# EAGLE board STorM32 NT motor module v008-panelized (EAGLE 6.5.0)
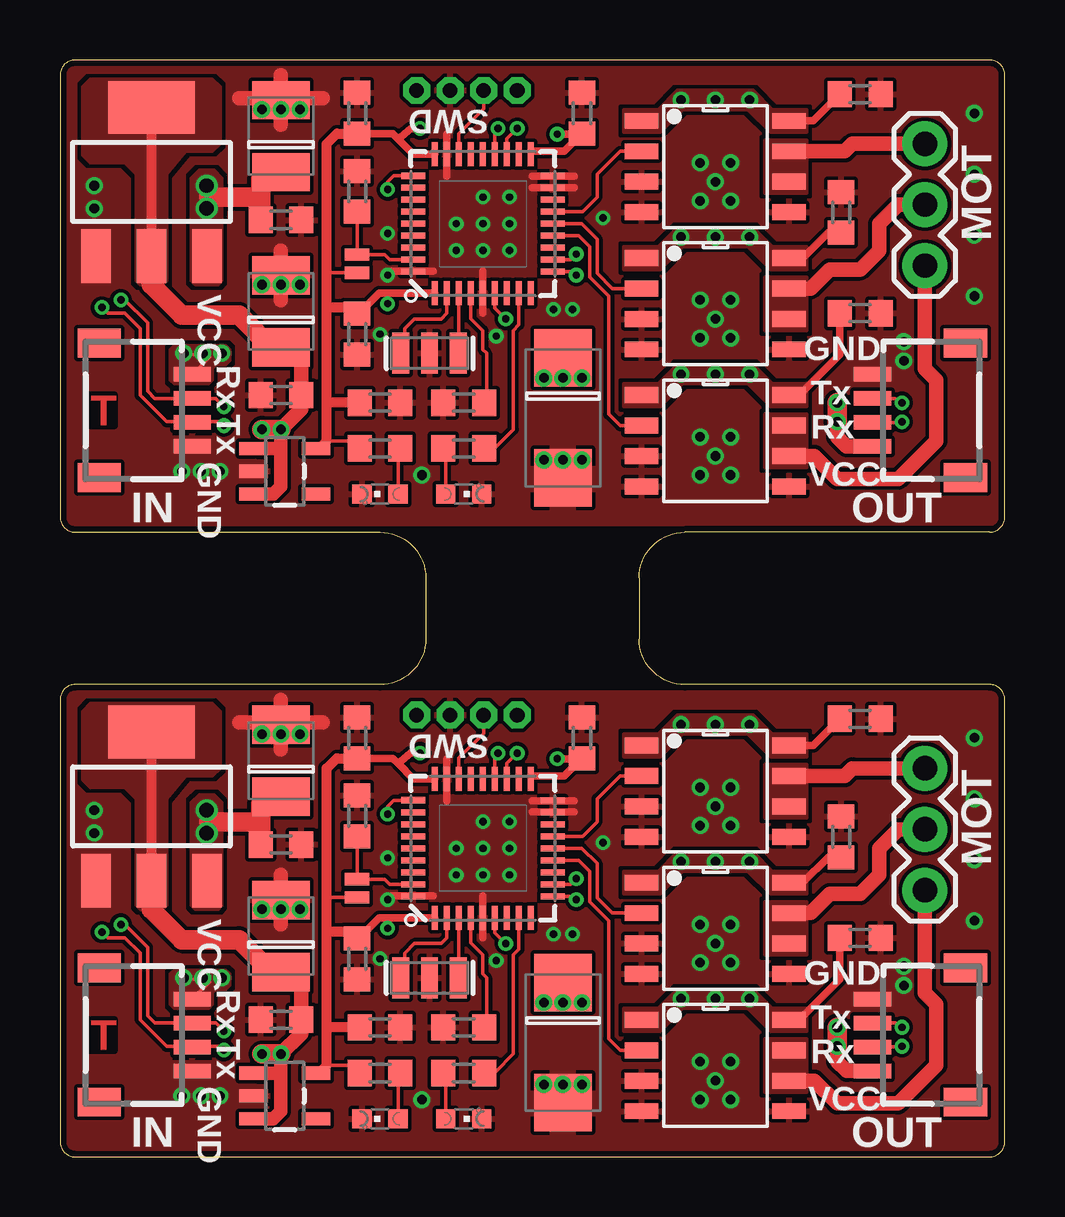
[diagram p0: board, top side]
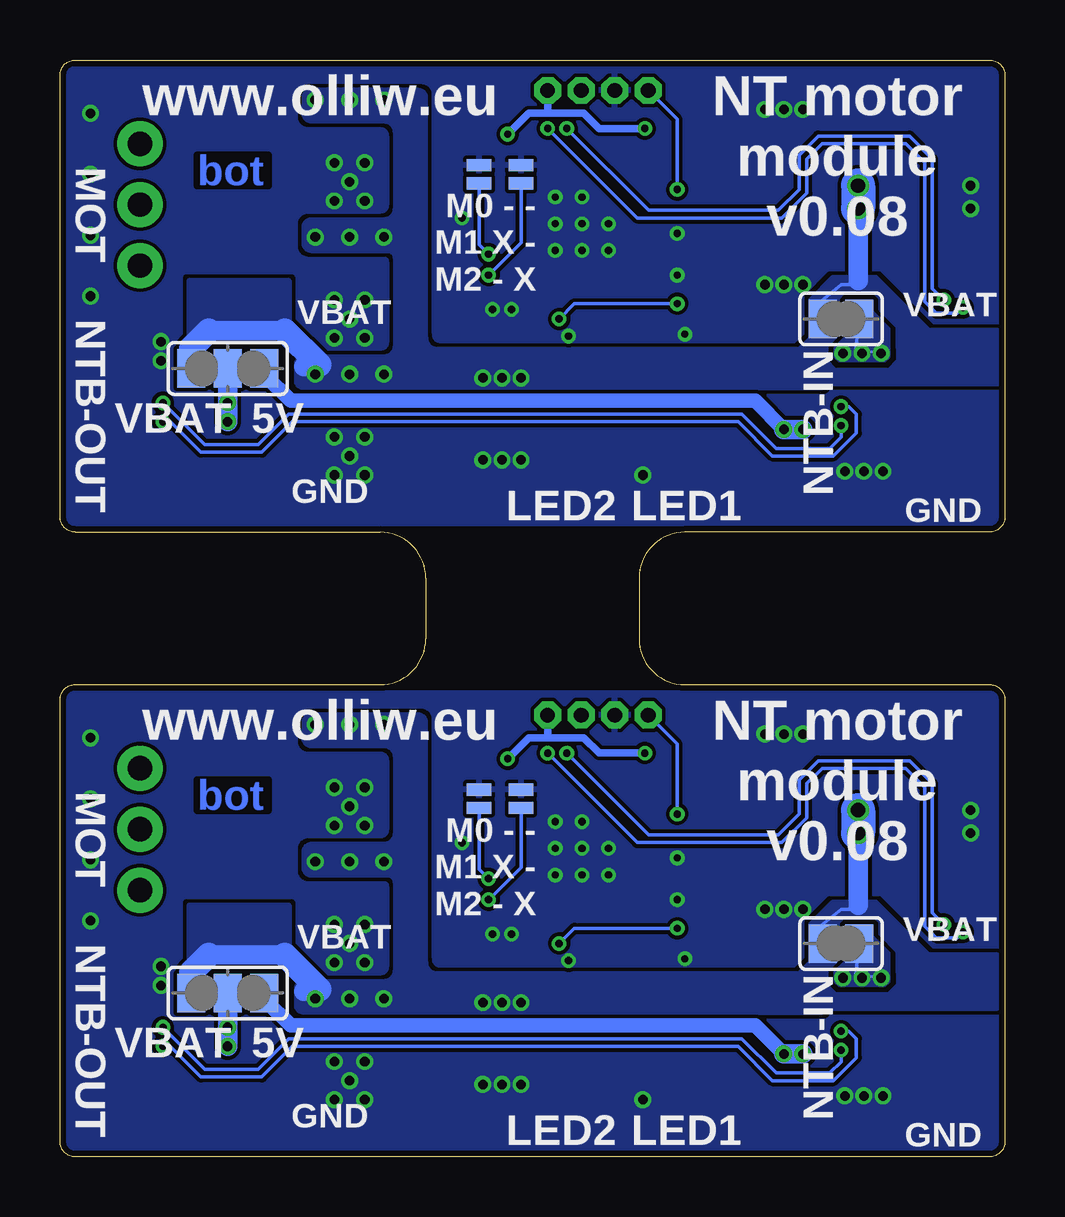
[diagram p1: board, bottom side, seen from below]

Size 39.37 x 45.72 mm. Coordinates in mm from the lower left corner, seen from the top.
Outline: 0.64,0 38.73,0 arc90 39.37,0.64 39.37,19.05 arc90 38.73,19.68 26.04,19.68 arc-90 24.13,21.59 24.13,24.13 arc-90 26.04,26.04 38.73,26.04 arc90 39.37,26.67 39.37,45.08 arc90 38.73,45.72 0.64,45.72 arc90 0,45.08 0,26.67 arc90 0.64,26.04 13.34,26.04 arc-90 15.24,24.13 15.24,21.59 arc-90 13.34,19.68 0.64,19.68 arc90 0,19.05 0,0.64 arc90 0.64,0
Copper layers (1*16): Top 0.035mm / dielectric 1.5mm / Bottom 0.035mm
Design rules "Fusion_eagle_rule_v1.1-shapes-supply-changed": minimum track width 6mil, minimum drill 12mil, track to track 6mil, track to pad 6mil, pad to pad 6mil, via to via 6mil, smd to smd 0mil, copper to edge 10mil, drill to drill 10mil, minimum pad ring 10mil, minimum via ring 6mil, stop-mask expansion 2mil, vias tented up to drill 100mil, thermal gap 6mil

## Footprints (pad centres in the part's own frame; a part is rotated, then mirrored left to right if it is on the bottom)
SMC_C = smd 2.4 x 2.4: + -2.5,0; - 2.5,0
C0603 = smd 1 x 1.1: 1 -0.85,0; 2 0.85,0
SMC_B = smd 1.6 x 2.4: + -1.5,0; - 1.5,0
SOT223 = smd 1.219 x 2.235: 1 -2.311,-3.099; 2 0,-3.099; 3 2.311,-3.099 | smd 3.6 x 2.2: 4 0,3.099
SOT23-5 = smd 0.55 x 1.2: 1 -0.95,-1.3; 2 0,-1.3; 3 0.95,-1.3; 4 0.95,1.3; 5 -0.95,1.3
4X1_1P27_OCT_BILEX = drill 0.61 pad 1.118 octagon: 1 0,0; 2 0,-1.397; 3 0,-2.794; 4 0,-4.191
CHIPLED_0603 = smd 0.8 x 0.8: A 0,-0.75; C 0,0.75
1X03 = drill 1.016 pad 1.88: 1 0,0; 2 2.54,0; 3 5.08,0
SM04B-SRSS-TB = smd 0.6 x 1.55: 1 -1.5,2.975; 2 -0.5,2.975; 3 0.5,2.975; 4 1.5,2.975 | smd 1.2 x 1.8: FIT@1 -2.8,-0.9; FIT@2 2.8,-0.9
R0603 = smd 1 x 1.1: 1 -0.85,0; 2 0.85,0
SJ_2 = smd 1.168 x 1.6: 1 -1.524,0; 2 0,0; 3 1.524,0
SJ_2S-NO = smd 0.508 x 1.016: 1 -0.381,0; 2 0.381,0
SJ_1T = smd 1.168 x 1.6: 1 -0.762,0; 3 0.762,0
VFQFPN36 = smd 1 x 0.25: 1 -2.9,2; 2 -2.9,1.5; 3 -2.9,1; 4 -2.9,0.5; 5 -2.9,0; 6 -2.9,-0.5; 7 -2.9,-1; 8 -2.9,-1.5; 9 -2.9,-2; 19 2.9,-2; 20 2.9,-1.5; 21 2.9,-1; 22 2.9,-0.5; 23 2.9,0; 24 2.9,0.5; 25 2.9,1; 26 2.9,1.5; 27 2.9,2 | smd 0.25 x 1: 10 -2,-2.9; 11 -1.5,-2.9; 12 -1,-2.9; 13 -0.5,-2.9; 14 0,-2.9; 15 0.5,-2.9; 16 1,-2.9; 17 1.5,-2.9; 18 2,-2.9; 29 1.5,2.9; 30 1,2.9; 31 0.5,2.9; 32 0,2.9; 33 -0.5,2.9; 34 -1,2.9; 35 -1.5,2.9; 36 -2,2.9 | smd 0.27 x 1: 28 2,2.9
DFN8 = smd 0.66 x 1.397: 1 0,-3.073; 2 1.27,-3.073; 3 2.54,-3.073; 4 3.81,-3.073; 5 3.81,3.073; 6 2.54,3.073; 7 1.27,3.073; 8 0,3.073
RESONATOR-SMD = smd 0.7 x 1.7: 1 -1.2,0; 2 0,0; 3 1.2,0

## Placement (x,y rotation side)
C1  33u/20V  [SMC_C]  20.96,4.76 270 top
C2  100n  [C0603]  33.34,18.26 0 top
C3  100n  [C0603]  32.54,13.34 90 top
C4  100n  [C0603]  33.34,9.13 0 top
C5  10u/6.3V  [SMC_B]  9.21,9.21 90 top
C6  100n  [C0603]  9.21,5.71 180 top
C7  1u  [C0603]  13.34,5.4 0 top
C8  100n  [C0603]  16.83,5.4 180 top
C9  100n  [C0603]  12.38,8.26 270 top
C10  100n  [C0603]  21.75,17.46 90 top
C11  100n  [C0603]  12.38,17.46 90 top
C12  10u/20V  [SMC_B]  9.21,16.51 90 top
C13  33u/20V  [SMC_C]  20.96,30.8 270 top
C14  100n  [C0603]  9.21,13.02 0 top
C15  100n  [C0603]  33.34,44.29 0 top
C16  100n  [C0603]  32.54,39.37 90 top
C17  100n  [C0603]  33.34,35.16 0 top
C18  100n  [C0603]  16.83,31.43 180 top
C19  100n  [C0603]  12.38,34.29 270 top
C20  100n  [C0603]  21.75,43.5 90 top
C21  100n  [C0603]  12.38,43.5 90 top
C22  10u/6.3V  [SMC_B]  9.21,35.24 90 top
C23  100n  [C0603]  9.21,31.75 180 top
C24  1u  [C0603]  13.34,31.43 0 top
C25  10u/20V  [SMC_B]  9.21,42.54 90 top
C26  100n  [C0603]  9.21,39.05 0 top
IC1  NCP1117ST50T3G  [SOT223]  3.81,14.61 0 top
IC2  [SOT23-5]  9.37,2.54 270 top
IC3  [SOT23-5]  9.37,28.57 270 top
IC4  NCP1117ST50T3G  [SOT223]  3.81,40.64 0 top
JP1  SWD  [4X1_1P27_OCT_BILEX]  19.05,44.45 270 top
JP2  SWD  [4X1_1P27_OCT_BILEX]  19.05,18.41 270 top
LED1  red  [CHIPLED_0603]  13.34,1.59 90 top
LED2  green  [CHIPLED_0603]  16.83,1.59 270 top
LED3  red  [CHIPLED_0603]  13.34,27.62 90 top
LED4  green  [CHIPLED_0603]  16.83,27.62 270 top
MOT  [1X03]  36.04,11.11 90 top
MOT1  [1X03]  36.04,37.15 90 top
NTB-IN  NTB1  [SM04B-SRSS-TB]  2.54,5.08 270 top
NTB-IN1  NTB1  [SM04B-SRSS-TB]  2.54,31.11 270 top
NTB-OUT  NTB2  [SM04B-SRSS-TB]  36.83,5.08 90 top
NTB-OUT1  NTB2  [SM04B-SRSS-TB]  36.83,31.11 90 top
R1  4.7k  [R0603]  13.34,3.49 0 top
R2  10k  [R0603]  12.38,40.24 270 top
R3  4.7k  [R0603]  13.34,29.53 0 top
R4  2.2k  [R0603]  16.83,29.53 180 top
R6  2.2k  [R0603]  16.83,3.49 180 top
R7  10k  [R0603]  12.38,14.21 270 top
SJ1  [SJ_2]  32.38,6.83 180 bottom
SJ2  BOOT0  [SJ_2S-NO]  12.38,11.19 90 top
SJ3  ID1  [SJ_2S-NO]  20.16,14.92 90 bottom
SJ4  ID2  [SJ_2S-NO]  21.91,14.92 90 bottom
SJ5  [SJ_1T]  6.83,8.89 0 bottom
SJ6  BOOT0  [SJ_2S-NO]  12.38,37.23 90 top
SJ7  [SJ_2]  32.38,32.86 180 bottom
SJ8  ID1  [SJ_2S-NO]  20.16,40.96 90 bottom
SJ9  ID2  [SJ_2S-NO]  21.91,40.96 90 bottom
SJ10  [SJ_1T]  6.83,34.92 0 bottom
U1  STM32F10XTXU6  [VFQFPN36]  17.62,12.86 90 top
U2  STM32F10XTXU6  [VFQFPN36]  17.62,38.89 90 top
U$1  TC4452DFN08  [DFN8]  27.3,5.71 270 top
U$2  TC4452DFN08  [DFN8]  27.3,11.43 270 top
U$3  TC4452DFN08  [DFN8]  27.3,31.75 270 top
U$4  TC4452DFN08  [DFN8]  27.3,17.14 270 top
U$5  TC4452DFN08  [DFN8]  27.3,37.46 270 top
U$6  TC4452DFN08  [DFN8]  27.3,43.18 270 top
Y1  RESONATORSMD  [RESONATOR-SMD]  15.4,7.46 0 top
Y2  RESONATORSMD  [RESONATOR-SMD]  15.4,33.5 0 top

## Library data of the parts
C1-C26 R1-R4 R6 R7 = rcl
IC1-IC4 SJ1-SJ10 Y1 Y2 = # SparkFun2
JP1 JP2 U$1-U$6 = # stdlib
LED1-LED4 = led
MOT MOT1 = # SparkFun
NTB-IN NTB-IN1 NTB-OUT NTB-OUT1 = con-jst2
U1 U2 = # stm32

## Nets
3.3V: C7.1 C9.1 C10.1 C11.1 IC2.5 JP2.1 R1.1 SJ2.1 U1.1 U1.6 U1.19 U1.27
3.3V1: C19.1 C20.1 C21.1 C24.1 IC3.5 JP1.1 R3.1 SJ6.1 U2.1 U2.6 U2.19 U2.27
5V: C5.+ C6.1 IC1.2 IC1.4 IC2.1 IC2.3 SJ1.1
5V1: C22.+ C23.1 IC3.1 IC3.3 IC4.2 IC4.4 SJ7.1
GND: C1.- C2.2 C3.2 C4.2 C5.- C6.2 C7.2 C8.2 C9.2 C10.2 C11.2 C12.- C14.2 IC1.1 IC2.2 JP2.3 LED1.C LED2.C NTB-IN.4 NTB-OUT.4 R7.1 SJ3.2 SJ4.2 U1.5 U1.17 U1.18 U1.26 U1.36 U$1.3 U$1.4 U$1.5 U$2.3 U$2.4 U$2.5 U$4.3 U$4.4 U$4.5 Y1.2
GND1: C13.- C15.2 C16.2 C17.2 C18.2 C19.2 C20.2 C21.2 C22.- C23.2 C24.2 C25.- C26.2 IC3.2 IC4.1 JP1.3 LED3.C LED4.C NTB-IN1.4 NTB-OUT1.4 R2.1 SJ8.2 SJ9.2 U2.5 U2.17 U2.18 U2.26 U2.36 U$3.3 U$3.4 U$3.5 U$5.3 U$5.4 U$5.5 U$6.3 U$6.4 U$6.5 Y2.2
LED: R6.1 U1.8
LED1: R4.1 U2.8
N$1: MOT.2 U$2.6 U$2.7
N$2: NTB-OUT.1 SJ1.2
N$3: SJ3.1 U1.10
N$4: SJ4.1 U1.11
N$5: MOT.1 U$1.6 U$1.7
N$6: MOT.3 U$4.6 U$4.7
N$7: C8.1 U1.4
N$8: R7.2 SJ2.2 U1.35
N$9: U1.2 Y1.1
N$10: U1.3 Y1.3
N$11: LED1.A R1.2
N$12: LED2.A R6.2
N$13: NTB-IN.1 SJ5.3
N$14: MOT1.2 U$5.6 U$5.7
N$15: MOT1.1 U$3.6 U$3.7
N$16: MOT1.3 U$6.6 U$6.7
N$17: C18.1 U2.4
N$18: R2.2 SJ6.2 U2.35
N$19: U2.2 Y2.1
N$20: U2.3 Y2.3
N$21: LED3.A R3.2
N$22: LED4.A R4.2
N$23: NTB-OUT1.1 SJ7.2
N$24: SJ8.1 U2.10
N$25: SJ9.1 U2.11
N$26: NTB-IN1.1 SJ10.3
PHASE1: U1.13 U$1.2
PHASE2: U1.14 U$2.2
PHASE3: U1.15 U$4.2
PHASE4: U2.13 U$3.2
PHASE5: U2.15 U$6.2
PHASE6: U2.14 U$5.2
RX: NTB-IN.2 NTB-OUT.2 U1.22
RX1: NTB-IN1.2 NTB-OUT1.2 U2.22
SWCLK: JP2.4 U1.28
SWCLK1: JP1.4 U2.28
SWDIO: JP2.2 U1.25
SWDIO1: JP1.2 U2.25
TX: NTB-IN.3 NTB-OUT.3 U1.21
TX1: NTB-IN1.3 NTB-OUT1.3 U2.21
VBAT: C1.+ C2.1 C3.1 C4.1 C12.+ C14.1 IC1.3 SJ1.3 SJ5.1 U$1.1 U$1.8 U$2.1 U$2.8 U$4.1 U$4.8
VBAT1: C13.+ C15.1 C16.1 C17.1 C25.+ C26.1 IC4.3 SJ7.3 SJ10.1 U$3.1 U$3.8 U$5.1 U$5.8 U$6.1 U$6.8

## Tracks (layer width: path | path; a pad name or v marks a point on that pad's centre or on a via)
3.3V  (via drill 0.3)
  Top 0.152: 12.17,9.37 C9.1 | U1.19 19.66,15.88 | U1.6 18.12,9.34 v18.57,8.89 | v13.65,9.53 13.65,9.96 | SJ2.1 11.21,10.81 11.11,10.95 | 21.61,16.59 C10.1 | 11.11,3.81 12.17,3.81 R1.1
  Top 0.305: U1.1 13.65,9.96 13.29,9.96 12.76,9.42 C9.1 | 19.66,15.88 21.01,15.88 C10.1 | U1.27 14.72,15.76 14.09,16.39 | 14.09,16.39 13.87,16.61 C11.1 | v15,16.83 14.61,16.83 14.09,16.39 | v20.72,16.59 21.61,16.59
  Top 0.406: 11.11,5.4 11.11,4.92 11.11,3.81 10.79,3.49 IC2.5 | 11.11,5.4 11.11,8.89 11.11,9.37 | 11.11,9.37 11.11,10.95 11.11,16.19 11.53,16.61 C11.1 | 12.17,9.37 11.11,9.37 | C7.1 11.11,5.4
  Bottom 0.152: v18.57,8.89 17.94,9.53 v13.65,9.53
  Bottom 0.305: v15,16.83 16.91,16.83 17.54,17.46 19.05,17.46 | 19.05,17.46 19.84,17.46 v20.72,16.59 | JP2.1 19.05,17.46
3.3V1  (via drill 0.3)
  Top 0.152: 12.17,35.4 C19.1 | U2.19 19.66,41.91 | U2.6 18.12,35.38 v18.57,34.92 | v13.65,35.56 13.65,35.99 | SJ6.1 11.21,36.85 11.11,36.99 | 21.61,42.62 C20.1 | 11.11,29.84 12.17,29.84 R3.1
  Top 0.305: U2.1 13.65,35.99 13.29,35.99 12.76,35.46 C19.1 | 19.66,41.91 21.01,41.91 C20.1 | U2.27 14.72,41.79 14.09,42.43 | 14.09,42.43 13.87,42.65 C21.1 | v15,42.86 14.61,42.86 14.09,42.43 | v20.72,42.62 21.61,42.62
  Top 0.406: 11.11,31.43 11.11,30.95 11.11,29.84 10.79,29.53 IC3.5 | 11.11,31.43 11.11,34.92 11.11,35.4 | 11.11,35.4 11.11,36.99 11.11,42.23 11.53,42.65 C21.1 | 12.17,35.4 11.11,35.4 | C24.1 11.11,31.43
  Bottom 0.152: v18.57,34.92 17.94,35.56 v13.65,35.56
  Bottom 0.305: v15,42.86 16.91,42.86 17.54,43.5 19.05,43.5 | 19.05,43.5 19.84,43.5 v20.72,42.62 | JP1.1 19.05,43.5
5V  (via drill 0.4)
  Top 0.152: 10.06,7.56 9.84,7.78 9.28,7.78 C5.+ | 8.89,3.49 9.21,3.65
  Top 0.406: IC1.4 IC1.2
  Top 0.559: IC2.3 8.89,1.59 9.21,1.9 9.21,3.65 v9.21,4.29 | IC2.1 8.89,3.49
  Top 0.61: 10.06,7.56 C6.1 10.06,5.14 v9.21,4.29
  Top 0.813: IC1.2 3.81,10.32 5.08,9.05 7.46,9.05 8.89,7.62 C5.+ | v8.41,4.29 v9.21,4.29
  Bottom 0.61: SJ1.1 30.86,6.57 29.77,5.48 10.4,5.48 v9.21,4.29
  Bottom 0.813: v8.41,4.29 v9.21,4.29
  pour Top (no thermals): 0.95,18.57 1.27,18.89 6.35,18.89 6.67,18.57 6.67,16.19 6.35,15.88 5.24,15.88 4.45,14.92 4.45,10.48 4.29,10.32 3.33,10.32 3.18,10.48 3.18,14.92 2.7,15.4 1.27,15.4 0.95,15.72
5V1  (via drill 0.4)
  Top 0.152: 10.06,33.6 9.84,33.81 9.28,33.81 C22.+ | 8.89,29.53 9.21,29.69
  Top 0.406: IC4.4 IC4.2
  Top 0.559: IC3.3 8.89,27.62 9.21,27.94 9.21,29.69 v9.21,30.32 | IC3.1 8.89,29.53
  Top 0.61: 10.06,33.6 C23.1 10.06,31.17 v9.21,30.32
  Top 0.813: IC4.2 3.81,36.35 5.08,35.08 7.46,35.08 8.89,33.65 C22.+ | v8.41,30.32 v9.21,30.32
  Bottom 0.61: SJ7.1 30.86,32.61 29.77,31.51 10.4,31.51 v9.21,30.32
  Bottom 0.813: v8.41,30.32 v9.21,30.32
  pour Top (no thermals): 0.95,44.61 1.27,44.93 6.35,44.93 6.67,44.61 6.67,42.23 6.35,41.91 5.24,41.91 4.45,40.96 4.45,36.51 4.29,36.35 3.33,36.35 3.18,36.51 3.18,40.96 2.7,41.43 1.27,41.43 0.95,41.75
GND  (via drill 0.3, 0.4)
  Top 0.305: 19.68,14.37 21.43,14.37 | 19.68,14.84 21.43,14.84 | 15.56,10.87 13.81,10.87 | 17.62,9.13 17.62,10.87 | 16.11,14.84 16.11,16.59
  Top 0.61: 7.46,18.1 10.95,18.1 | 9.21,9.68 9.21,11.75 | 9.21,16.99 9.21,19.05
  other vias: 27.94,2.38 26.67,3.97 27.94,3.97 26.67,2.38 27.3,3.18 27.94,8.1 26.67,9.68 27.94,9.68 26.67,8.1 27.3,8.89 27.94,13.81 26.67,15.4 27.94,15.4 26.67,13.81 27.3,14.61 18.18,8.18 13.65,12.46 13.65,10.72 21.75,3.02 20.96,3.02 20.16,3.02 1.43,13.49 1.43,14.45 8.41,17.62 9.21,17.62 10,17.62 10,10.32 9.21,10.32 8.41,10.32 5.08,2.54 5.87,2.54 35.16,7.94 22.62,13.1 21.35,9.29 20.56,9.29 17.62,12.86 16.51,11.75 18.73,11.75 18.73,13.97 18.73,12.86 17.62,11.75 16.51,12.86 17.62,13.97 13.34,8.26 15.08,2.38 38.1,12.38 38.1,14.92 38.1,17.46 38.1,9.84 35.16,7.14 6.67,2.54
  pour Top (isolate 0.152, rank 6): 39.37,19.37 0,19.37 0,0 39.37,0
  pour Bottom (isolate 0.152, rank 6): 39.37,0 0,0 0,19.37 39.37,19.37
  pour Top (no thermals): 19.37,2.7 22.54,2.7 22.54,1.75 19.37,1.75
  pour Top (no thermals): 20.48,0.64 20.48,3.65 21.43,3.65 21.43,0.64
  pour Top (no thermals): 4.29,3.97 6.67,3.97 6.67,2.86 4.29,2.86
  pour Top (no thermals): 0.64,13.18 0.64,10.16 2.38,10.16 2.38,13.18
  pour Top (no thermals): 32.7,7.14 32.7,6.03 34.92,6.03 34.92,7.14
  pour Top (no thermals): 6.67,3.02 8.41,3.02 8.57,2.86 8.57,2.22 8.41,2.06 6.67,2.06
GND1  (via drill 0.3, 0.4)
  Top 0.305: 19.68,40.4 21.43,40.4 | 19.68,40.88 21.43,40.88 | 15.56,36.91 13.81,36.91 | 17.62,35.16 17.62,36.91 | 16.11,40.88 16.11,42.62
  Top 0.61: 7.46,44.13 10.95,44.13 | 9.21,35.72 9.21,37.78 | 9.21,43.02 9.21,45.08
  other vias: 27.94,28.42 26.67,30 27.94,30 26.67,28.42 27.3,29.21 27.94,34.13 26.67,35.72 27.94,35.72 26.67,34.13 27.3,34.92 27.94,39.85 26.67,41.43 27.94,41.43 26.67,39.85 27.3,40.64 18.18,34.21 13.65,38.5 13.65,36.75 21.75,29.05 20.96,29.05 20.16,29.05 1.43,39.53 1.43,40.48 8.41,43.66 9.21,43.66 10,43.66 10,36.35 9.21,36.35 8.41,36.35 5.08,28.57 5.87,28.57 35.16,33.97 22.62,39.13 21.35,35.32 20.56,35.32 17.62,38.89 16.51,37.78 18.73,37.78 18.73,40 18.73,38.89 17.62,37.78 16.51,38.89 17.62,40 13.34,34.29 15.08,28.42 38.1,38.42 38.1,40.96 38.1,43.5 38.1,35.88 35.16,33.18 6.67,28.57
  pour Top (isolate 0.152, rank 6): 39.37,45.72 0,45.72 0,26.35 39.37,26.35
  pour Bottom (isolate 0.152, rank 6): 39.37,26.35 0,26.35 0,45.72 39.37,45.72
  pour Top (no thermals): 19.37,28.73 22.54,28.73 22.54,27.78 19.37,27.78
  pour Top (no thermals): 20.48,26.67 20.48,29.69 21.43,29.69 21.43,26.67
  pour Top (no thermals): 4.29,30 6.67,30 6.67,28.89 4.29,28.89
  pour Top (no thermals): 0.64,39.21 0.64,36.2 2.38,36.2 2.38,39.21
  pour Top (no thermals): 32.7,33.18 32.7,32.07 34.92,32.07 34.92,33.18
  pour Top (no thermals): 6.67,29.05 8.41,29.05 8.57,28.89 8.57,28.26 8.41,28.1 6.67,28.1
LED
  Top 0.152: R6.1 18.15,3.55 18.89,4.29 18.89,8.41 19.12,8.64 U1.8
LED1
  Top 0.152: R4.1 18.15,29.58 18.89,30.32 18.89,34.45 19.12,34.68 U2.8
N$1
  Top 0.61: U$2.7 31.27,10.16 32.07,10.95 33.34,10.95 34.13,11.75 34.13,12.86 34.92,13.65 MOT.2
  pour Top (no thermals): 29.37,10.64 31.11,10.64 31.11,8.41 29.37,8.41
N$2  (via drill 0.4)
  Top 0.61: NTB-OUT.1 32.79,3.58 32.38,3.97 v32.38,4.6
  Top 0.813: v32.38,4.6 v32.38,5.4
  Bottom 0.813: SJ1.2 v32.38,5.4 v32.38,4.6
N$3  (via drill 0.3)
  Top 0.152: U1.10 21.37,10.86 v21.51,10.72
  Bottom 0.152: v21.51,10.72 20.16,12.07 SJ3.1
N$4  (via drill 0.3)
  Top 0.152: U1.11 21.28,11.36 v21.51,11.59
  Bottom 0.152: v21.51,11.59 21.91,11.99 SJ4.1
N$5
  Top 0.61: MOT.1 36.04,6.83 36.51,6.35 36.51,3.81 34.92,2.22 32.38,2.22 31.43,3.18 U$1.6
  pour Top (no thermals): 29.37,4.92 31.11,4.92 31.11,2.7 29.37,2.7
N$6
  Top 0.61: U$4.7 32.7,15.88 33.02,16.19 MOT.3
  pour Top (no thermals): 29.37,16.35 31.11,16.35 31.11,14.13 29.37,14.13
N$7
  Top 0.152: U1.4 17.12,8.91 17.62,8.41 17.62,7.62 17.78,7.46 17.78,5.45 C8.1
N$8
  Top 0.152: U1.35 13.74,11.36 13.53,11.57 SJ2.2 R7.2
N$9
  Top 0.152: U1.2 16.12,9.14 15.88,8.89 14.76,8.89 14.36,8.48 14.36,7.78 Y1.1
N$10
  Top 0.152: U1.3 16.62,7.76 Y1.3
N$11
  Top 0.152: LED1.A 14.09,3.39 R1.2
N$12
  Top 0.152: LED2.A 16.08,3.39 R6.2
N$13  (via drill 0.4)
  Top 0.152: v5.16,7.46 6.24,7.3 NTB-IN.1
  Bottom 0.152: SJ5.3 6.22,7.59 v5.16,7.46
  other vias: 5.95,7.46 6.75,7.46
  pour Top (no thermals): 4.76,7.78 6.91,7.78 7.06,7.62 7.06,7.14 6.91,6.99 6.51,6.99 6.35,6.83 6.35,6.35 6.19,6.19 4.76,6.19 4.6,6.35 4.6,7.62
  pour Bottom (no thermals): 4.84,8.49 4.84,7.3 5,7.14 6.91,7.14 7.06,7.3 7.06,7.7 5.56,9.21
N$14
  Top 0.61: U$5.7 31.27,36.2 32.07,36.99 33.34,36.99 34.13,37.78 34.13,38.89 34.92,39.69 MOT1.2
  pour Top (no thermals): 29.37,36.67 31.11,36.67 31.11,34.45 29.37,34.45
N$15
  Top 0.61: MOT1.1 36.04,32.86 36.51,32.38 36.51,29.84 34.92,28.26 32.38,28.26 31.43,29.21 U$3.6
  pour Top (no thermals): 29.37,30.96 31.11,30.96 31.11,28.73 29.37,28.73
N$16
  Top 0.61: U$6.7 32.7,41.91 33.02,42.23 MOT1.3
  pour Top (no thermals): 29.37,42.39 31.11,42.39 31.11,40.16 29.37,40.16
N$17
  Top 0.152: U2.4 17.12,34.95 17.62,34.45 17.62,33.65 17.78,33.5 17.78,31.49 C18.1
N$18
  Top 0.152: U2.35 13.74,37.39 13.53,37.61 SJ6.2 R2.2
N$19
  Top 0.152: U2.2 16.12,35.17 15.88,34.92 14.76,34.92 14.36,34.52 14.36,33.81 Y2.1
N$20
  Top 0.152: U2.3 16.62,33.79 Y2.3
N$21
  Top 0.152: LED3.A 14.09,29.43 R3.2
N$22
  Top 0.152: LED4.A 16.08,29.43 R4.2
N$23  (via drill 0.4)
  Top 0.61: NTB-OUT1.1 32.79,29.62 32.38,30 v32.38,30.64
  Top 0.813: v32.38,30.64 v32.38,31.43
  Bottom 0.813: SJ7.2 v32.38,31.43 v32.38,30.64
N$24  (via drill 0.3)
  Top 0.152: U2.10 21.37,36.89 v21.51,36.75
  Bottom 0.152: v21.51,36.75 20.16,38.1 SJ8.1
N$25  (via drill 0.3)
  Top 0.152: U2.11 21.28,37.39 v21.51,37.62
  Bottom 0.152: v21.51,37.62 21.91,38.02 SJ9.1
N$26  (via drill 0.4)
  Top 0.152: v5.16,33.5 6.24,33.34 NTB-IN1.1
  Bottom 0.152: SJ10.3 6.22,33.62 v5.16,33.5
  other vias: 5.95,33.5 6.75,33.5
  pour Top (no thermals): 4.76,33.81 6.91,33.81 7.06,33.65 7.06,33.18 6.91,33.02 6.51,33.02 6.35,32.86 6.35,32.38 6.19,32.23 4.76,32.23 4.6,32.38 4.6,33.65
  pour Bottom (no thermals): 4.84,34.53 4.84,33.34 5,33.18 6.91,33.18 7.06,33.34 7.06,33.73 5.56,35.24
PHASE1
  Top 0.152: U1.13 21.61,12.36 22.07,11.91 22.07,10.64 22.86,9.84 22.86,4.92 23.34,4.45 U$1.2
PHASE2
  Top 0.152: U1.14 21.75,12.86 22.38,12.22 22.38,10.79 23.02,10.16 U$2.2
PHASE3
  Top 0.152: U1.15 21.77,13.36 22.38,13.97 22.38,14.92 23.34,15.88 U$4.2
PHASE4
  Top 0.152: U2.13 21.61,38.39 22.07,37.94 22.07,36.67 22.86,35.88 22.86,30.96 23.34,30.48 U$3.2
PHASE5
  Top 0.152: U2.15 21.77,39.39 22.38,40 22.38,40.96 23.34,41.91 U$6.2
PHASE6
  Top 0.152: U2.14 21.75,38.89 22.38,38.26 22.38,36.83 23.02,36.2 U$5.2
RX  (via drill 0.3)
  Top 0.152: U1.22 18.12,16.69 v18.26,16.83 | v2.54,9.68 2.7,9.68 3.65,8.73 3.65,5.87 3.94,5.58 NTB-IN.2 6.48,5.58 v6.83,5.24 | NTB-OUT.2 34.79,4.58 v35.08,4.6
  Bottom 0.152: v18.26,16.83 14.84,13.41 9.45,13.41 8.57,14.29 8.57,15.72 7.78,16.51 3.97,16.51 3.02,15.56 3.02,10.16 v2.54,9.68 | v35.08,4.6 34.77,4.6 33.5,3.33 30.96,3.33 29.69,4.6 11.11,4.6 9.68,3.18 7.14,3.18 6.19,4.13 6.19,4.92 6.51,5.24 v6.83,5.24
RX1  (via drill 0.3)
  Top 0.152: U2.22 18.12,42.73 v18.26,42.86 | v2.54,35.72 2.7,35.72 3.65,34.77 3.65,31.91 3.94,31.61 NTB-IN1.2 6.48,31.61 v6.83,31.27 | NTB-OUT1.2 34.79,30.62 v35.08,30.64
  Bottom 0.152: v18.26,42.86 14.84,39.45 9.45,39.45 8.57,40.32 8.57,41.75 7.78,42.54 3.97,42.54 3.02,41.59 3.02,36.2 v2.54,35.72 | v35.08,30.64 34.77,30.64 33.5,29.37 30.96,29.37 29.69,30.64 11.11,30.64 9.68,29.21 7.14,29.21 6.19,30.16 6.19,30.96 6.51,31.27 v6.83,31.27
SWCLK  (via drill 0.3)
  Top 0.152: U1.28 13.91,14.86 13.65,14.61 v13.65,14.29
  Bottom 0.152: v13.65,14.29 13.65,17.21 JP2.4
SWCLK1  (via drill 0.3)
  Top 0.152: U2.28 13.91,40.89 13.65,40.64 v13.65,40.32
  Bottom 0.152: v13.65,40.32 13.65,43.24 JP1.4
SWDIO
  Top 0.152: U1.25 16.62,16.62 17.65,17.65 JP2.2
SWDIO1
  Top 0.152: U2.25 16.62,42.66 17.65,43.69 JP1.2
TX  (via drill 0.3)
  Top 0.152: U1.21 18.62,16.4 v19.05,16.83 | NTB-IN.3 5.58,4.58 5.71,4.6 | v1.75,9.37 1.98,9.13 2.7,9.13 3.33,8.49 3.33,5.71 4.45,4.6 5.71,4.6 | NTB-OUT.3 34.79,5.58 v35.08,5.4 | 5.71,4.6 6.67,4.6 v6.83,4.45
  Bottom 0.152: v19.05,16.83 15.32,13.1 9.29,13.1 8.26,14.13 8.26,15.56 7.62,16.19 4.13,16.19 3.33,15.4 3.33,9.6 2.86,9.13 1.98,9.13 v1.75,9.37 | v35.08,5.4 33.34,3.65 31.11,3.65 29.84,4.92 10.95,4.92 9.53,3.49 7.3,3.49 6.83,3.97 v6.83,4.45
TX1  (via drill 0.3)
  Top 0.152: U2.21 18.62,42.43 v19.05,42.86 | NTB-IN1.3 5.58,30.62 5.71,30.64 | v1.75,35.4 1.98,35.16 2.7,35.16 3.33,34.53 3.33,31.75 4.45,30.64 5.71,30.64 | NTB-OUT1.3 34.79,31.61 v35.08,31.43 | 5.71,30.64 6.67,30.64 v6.83,30.48
  Bottom 0.152: v19.05,42.86 15.32,39.13 9.29,39.13 8.26,40.16 8.26,41.59 7.62,42.23 4.13,42.23 3.33,41.43 3.33,35.64 2.86,35.16 1.98,35.16 v1.75,35.4 | v35.08,31.43 33.34,29.69 31.11,29.69 29.84,30.96 10.95,30.96 9.53,29.53 7.3,29.53 6.83,30 v6.83,30.48
VBAT  (via drill 0.4, 0.6)
  Top 0.152: v20.96,6.43 C1.+ | v6.11,13.49 v6.11,14.45 6.11,14.05 6.19,13.97 | 8.36,14.71 8.41,14.76 8.96,14.76 C12.+
  Top 0.305: U$4.8 31.38,17.14 C2.1 | C4.1 32.49,7.41 30.8,5.71 U$1.8 | C3.1 32.01,12.49 30.96,11.43 U$2.8
  Top 0.406: 6.12,13.41 v6.11,13.49
  Top 0.813: C14.1 8.36,13.97 | 8.36,13.97 8.36,14.71 | 6.19,13.97 8.36,13.97
  Bottom 0.152: 29.21,6.91 v28.73,6.59 | SJ5.1 7.75,9.56 6.83,10.32 6.19,10.32 6.19,10.4 6.11,10.48
  Bottom 0.813: v6.11,13.49 6.11,10.48 | 33.18,8.41 30,8.41 | 28.57,6.99 29.21,6.91
  Bottom 1.016: SJ1.3 33.91,7.68 33.18,8.41 | 30,8.41 28.57,6.99
  Bottom 1.422: v6.11,14.45 v6.11,13.49
  other vias: 27.3,18.02 25.88,18.02 28.73,18.02 27.3,12.3 25.88,12.3 28.73,12.3 27.3,6.59 25.88,6.59 21.75,6.43 20.16,6.43
  pour Bottom: 29.21,18.1 29.21,17.46 arc-90 28.89,17.14 25.88,17.14 arc90 25.4,16.67 25.4,13.49 arc90 25.88,13.02 28.89,13.02 arc-90 29.21,12.7 29.21,12.07 arc-90 28.89,11.75 25.72,11.75 arc90 25.4,11.43 25.4,7.78 arc90 25.88,7.3 29.21,7.3 arc-90 29.53,6.99 29.53,6.35 arc-90 29.21,6.03 7.62,6.03 7.46,6.19 0.32,6.19 0.32,8.41 4.45,8.41 4.45,7.14 4.84,6.75 7.06,6.75 7.46,7.14 7.46,7.62 23.65,7.62 arc90 24.13,8.1 24.13,18.1 arc-90 24.45,18.41 28.89,18.41 arc-90
  pour Top (no thermals): 31.11,16.67 29.61,16.67 28.65,17.62 25.96,17.62 25,16.67 23.5,16.67 23.5,17.62 24.92,17.62 25.72,18.41 28.89,18.41 29.69,17.62 31.11,17.62
  pour Top (no thermals): 31.11,10.95 29.61,10.95 28.65,11.91 25.96,11.91 25,10.95 23.5,10.95 23.5,11.91 24.92,11.91 25.72,12.7 28.89,12.7 29.69,11.91 31.11,11.91
  pour Top (no thermals): 31.11,5.24 29.61,5.24 28.65,6.19 25.96,6.19 25,5.24 23.5,5.24 23.5,6.19 24.92,6.19 25.72,6.99 28.89,6.99 29.69,6.19 31.11,6.19
  pour Top (no thermals): 5.64,10.32 5.48,10.48 5.48,14.76 5.79,15.08 6.43,15.08 6.75,14.76 6.75,10.48 6.59,10.32
  pour Bottom: 29.84,10.48 29.84,8.18 33.97,8.18 33.97,10.48
  pour Bottom (no thermals): 4.45,7.7 4.45,8.57 5.16,9.29 5.16,9.76 5.4,10 6.75,10 6.99,9.76 6.99,8.26 7.46,7.78 7.46,7.54 8.73,7.46 8.1,8.1 8.1,9.68 7.14,10.64 5.4,10.64 3.02,8.26 2.86,7.78
VBAT1  (via drill 0.4, 0.6)
  Top 0.152: v20.96,32.46 C13.+ | v6.11,39.53 v6.11,40.48 6.11,40.08 6.19,40 | 8.36,40.74 8.41,40.8 8.96,40.8 C25.+
  Top 0.305: U$6.8 31.38,43.18 C15.1 | C17.1 32.49,33.44 30.8,31.75 U$3.8 | C16.1 32.01,38.52 30.96,37.46 U$5.8
  Top 0.406: 6.12,39.44 v6.11,39.53
  Top 0.813: C26.1 8.36,40 | 8.36,40 8.36,40.74 | 6.19,40 8.36,40
  Bottom 0.152: 29.21,32.94 v28.73,32.62 | SJ10.1 7.75,35.59 6.83,36.35 6.19,36.35 6.19,36.43 6.11,36.51
  Bottom 0.813: v6.11,39.53 6.11,36.51 | 33.18,34.45 30,34.45 | 28.57,33.02 29.21,32.94
  Bottom 1.016: SJ7.3 33.91,33.72 33.18,34.45 | 30,34.45 28.57,33.02
  Bottom 1.422: v6.11,40.48 v6.11,39.53
  other vias: 27.3,44.05 25.88,44.05 28.73,44.05 27.3,38.34 25.88,38.34 28.73,38.34 27.3,32.62 25.88,32.62 21.75,32.46 20.16,32.46
  pour Bottom: 29.21,44.13 29.21,43.5 arc-90 28.89,43.18 25.88,43.18 arc90 25.4,42.7 25.4,39.53 arc90 25.88,39.05 28.89,39.05 arc-90 29.21,38.73 29.21,38.1 arc-90 28.89,37.78 25.72,37.78 arc90 25.4,37.46 25.4,33.81 arc90 25.88,33.34 29.21,33.34 arc-90 29.53,33.02 29.53,32.38 arc-90 29.21,32.07 7.62,32.07 7.46,32.23 0.32,32.23 0.32,34.45 4.45,34.45 4.45,33.18 4.84,32.78 7.06,32.78 7.46,33.18 7.46,33.65 23.65,33.65 arc90 24.13,34.13 24.13,44.13 arc-90 24.45,44.45 28.89,44.45 arc-90
  pour Top (no thermals): 31.11,42.7 29.61,42.7 28.65,43.66 25.96,43.66 25,42.7 23.5,42.7 23.5,43.66 24.92,43.66 25.72,44.45 28.89,44.45 29.69,43.66 31.11,43.66
  pour Top (no thermals): 31.11,36.99 29.61,36.99 28.65,37.94 25.96,37.94 25,36.99 23.5,36.99 23.5,37.94 24.92,37.94 25.72,38.73 28.89,38.73 29.69,37.94 31.11,37.94
  pour Top (no thermals): 31.11,31.27 29.61,31.27 28.65,32.23 25.96,32.23 25,31.27 23.5,31.27 23.5,32.23 24.92,32.23 25.72,33.02 28.89,33.02 29.69,32.23 31.11,32.23
  pour Top (no thermals): 5.64,36.35 5.48,36.51 5.48,40.8 5.79,41.12 6.43,41.12 6.75,40.8 6.75,36.51 6.59,36.35
  pour Bottom: 29.84,36.51 29.84,34.21 33.97,34.21 33.97,36.51
  pour Bottom (no thermals): 4.45,33.73 4.45,34.61 5.16,35.32 5.16,35.8 5.4,36.04 6.75,36.04 6.99,35.8 6.99,34.29 7.46,33.81 7.46,33.58 8.73,33.5 8.1,34.13 8.1,35.72 7.14,36.67 5.4,36.67 3.02,34.29 2.86,33.81

## Text on the board
Top: T | T
Bottom: bot | bot
tNames: SWD | MOT | VCC | GND | Rx | Tx | Tx | Rx | GND | VCC | IN | OUT | SWD | MOT | VCC | GND | Rx | Tx | Tx | Rx | GND | VCC | IN | OUT
bNames: NT motor / module / v0.08 | www.olliw.eu | MOT | M0 - - / M1 X - / M2 - X | VBAT | VBAT | NTB-OUT | NTB-IN | 5V | VBAT | GND | GND | LED1 | LED2 | NT motor / module / v0.08 | www.olliw.eu | MOT | M0 - - / M1 X - / M2 - X | VBAT | VBAT | NTB-OUT | NTB-IN | 5V | VBAT | GND | LED1 | GND | LED2